# Allegro board galvo_ctrl_brd.brd
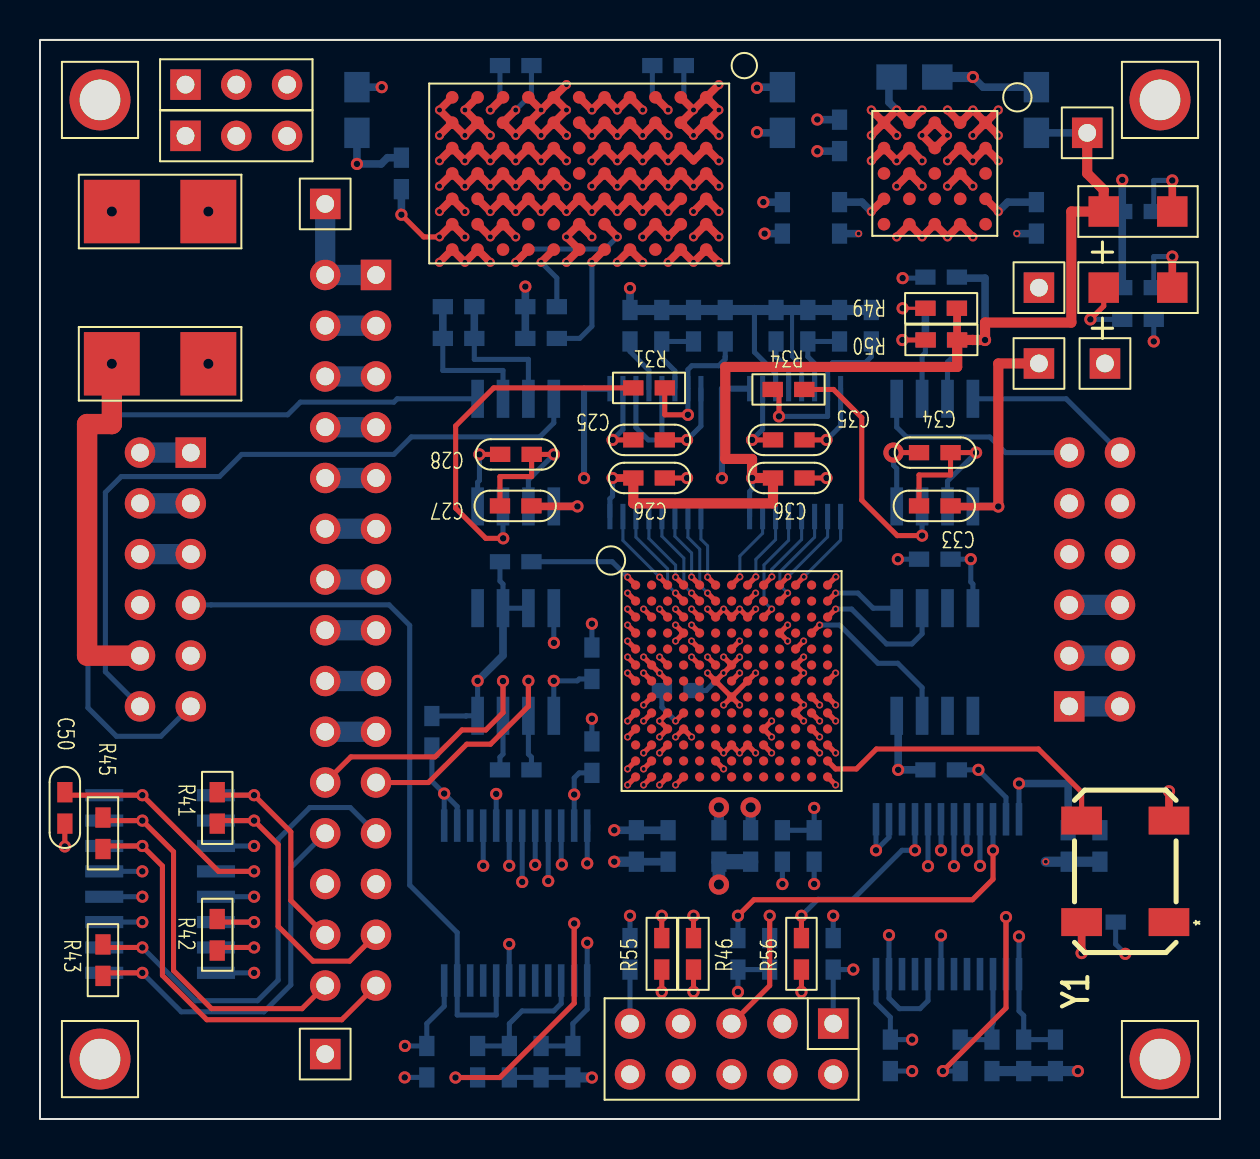
[diagram p0: board, top side]
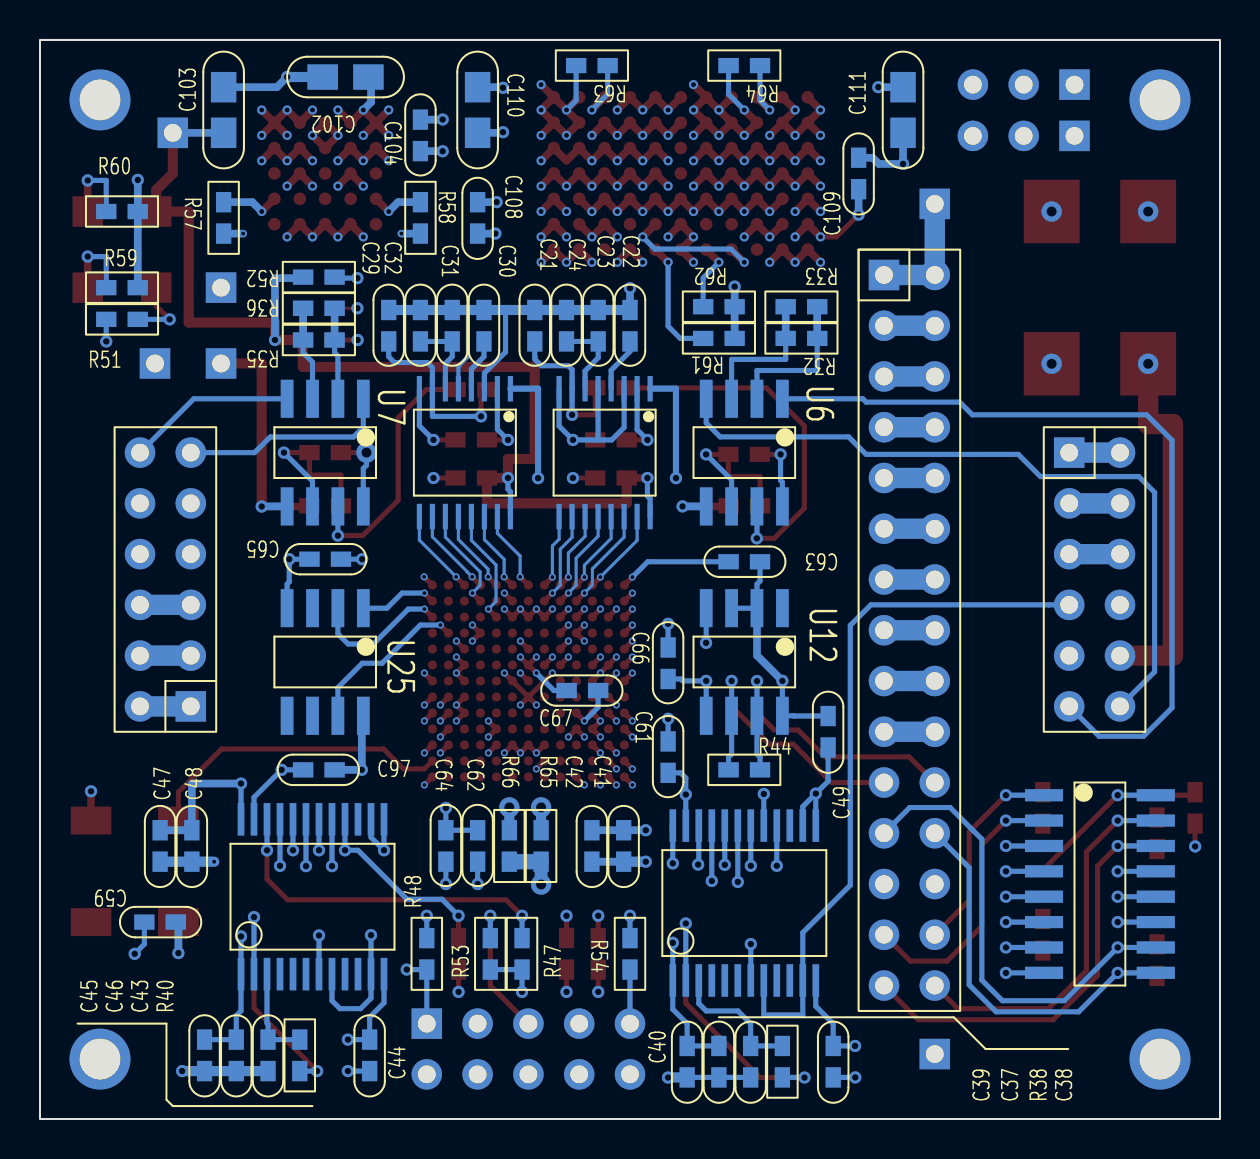
[diagram p1: board, bottom side, seen from below]

Outline 59 x 54 mm; copper layers: TOP, L2, L3, L4, L5, BOTTOM. Coordinates in mm from the lower left corner of the outline.
Outline path: rectangle 0,0 59,54

## Placement (name value [footprint] x y rotation side)
C21  220pF  [0603C]  34.26 39.7 270 bottom
C22  4.7uF  [0603C]  29.5 39.7 270 bottom
C23  10uF  [0603C]  31.09 39.7 270 bottom
C24  1uF  [0603C]  32.68 39.7 270 bottom
C25  0.1uF  [0603C]  30.45 33.98 180 top
C26  0.1uF  [0603C]  30.45 32.08 180 top
C27  0.1uF  [0603C]  23.79 30.68 0 top
C28  0.1uF  [0603C]  23.79 33.26 180 top
C29  220pF  [0603C]  41.57 39.7 270 bottom
C30  4.7uF  [0603C]  36.8 39.7 270 bottom
C31  10uF  [0603C]  38.39 39.7 270 bottom
C32  1uF  [0603C]  39.98 39.7 270 bottom
C33  0.1uF  [0603C]  44.74 30.68 0 top
C34  0.1uF  [0603C]  44.74 33.35 180 top
C35  0.1uF  [0603C]  37.44 33.98 180 top
C36  0.1uF  [0603C]  37.44 32.08 180 top
C37  1uF  [0603C]  23.47 2.87 90 bottom
C38  0.1uF  [0603C]  19.34 2.87 90 bottom
C39  0.1uF  [0603C]  25.06 2.87 90 bottom
C40  10uF  [0603C]  26.64 2.87 90 bottom
C41  0.1uF  [0603C]  29.82 13.66 90 bottom
C42  10uF  [0603C]  31.41 13.66 90 bottom
C43  1uF  [0603C]  47.6 3.19 90 bottom
C44  0.1uF  [0603C]  42.52 3.19 90 bottom
C45  0.1uF  [0603C]  50.77 3.19 90 bottom
C46  10uF  [0603C]  49.19 3.19 90 bottom
C47  0.1uF  [0603C]  53 13.66 90 bottom
C48  10uF  [0603C]  51.41 13.66 90 bottom
C49  0.1uF  [0603C]  19.59 19.38 90 bottom
C50  0.1uF  [0603C]  1.24 15.57 270 top
C59  0.1uF  [0603C]  53 9.85 0 bottom
C61  0.1uF  [0603C]  27.6 18.11 270 bottom
C62  0.1uF  [0603C]  37.12 13.66 270 bottom
C63  0.1uF  [0603C]  23.79 27.89 0 bottom
C64  0.1uF  [0603C]  38.71 13.66 270 bottom
C65  0.1uF  [0603C]  44.74 28.02 0 bottom
C66  0.1uF  [0603C]  27.6 22.81 270 bottom
C67  0.1uF  [0603C]  31.88 21.44 180 bottom
C97  0.1uF  [0603C]  45.06 17.47 180 bottom
C102  47uF  [0805C]  43.72 52.15 0 bottom
C103  47uF  [0805C]  49.82 50.49 90 bottom
C104  4.7uF  [0603C]  39.98 49.22 270 bottom
C108  4.7uF  [0603C]  37.12 45.1 90 bottom
C109  4.7uF  [0603C]  18.07 47.32 90 bottom
C110  22uF  [0805C]  37.12 50.49 270 bottom
C111  47uF  [0805C]  15.85 50.49 90 bottom
D1  LED  [1206_LED]  54.9 41.6 0 top
D2  LED  [1206_LED]  54.9 45.41 0 top
J1  X_DRV_IF  [IDC12]  6.27 25.73 180 bottom
J2  Y_DRV_IF  [IDC12]  52.73 28.27 0 bottom
J3  HEADER 15X2  [IDC30]  15.53 18.11 180 bottom
J5  UART1  [SIP3]  9.82 49.2 90 top
J6  UART2  [SIP3]  9.82 51.76 90 top
J7  CON10  [IDC10]  34.58 3.5 270 top
L2  FB  [2412L]  6.01 45.41 180 top
L3  FB  [2412L]  6.01 37.79 180 top
P1  10M02SC U169  [UBGA169]  34.58 21.92 0 top
R31  100  [0603R]  30.45 36.59 0 top
R32  220  [0603R]  20.93 39.06 0 bottom
R33  NC  [0603R]  20.93 40.65 0 bottom
R34  100  [0603R]  37.42 36.51 180 top
R35  220  [0603R]  45.06 38.99 0 bottom
R36  NC  [0603R]  45.06 40.57 0 bottom
R38  100K  [0603R]  21.88 2.87 90 bottom
R40  100K  [0603R]  46.01 3.19 90 bottom
R41  100  [0603R]  8.86 15.57 90 top
R42  100  [0603R]  8.86 9.22 270 top
R43  100  [0603R]  3.15 7.95 270 top
R44  120  [0603R]  23.79 17.47 180 bottom
R45  100  [0603R]  3.15 14.3 90 top
R46  10K  [0603R]  32.68 8.27 90 top
R47  10K  [0603R]  34.9 8.27 90 bottom
R48  1K  [0603R]  39.66 8.27 90 bottom
R49  10K  [0603R]  45.06 40.57 180 top
R50  10K  [0603R]  45.07 38.99 180 top
R51  10K  [0603R]  54.9 40.02 180 bottom
R52  10K  [0603R]  45.06 42.13 180 bottom
R53  10K  [0603R]  36.49 8.27 90 bottom
R54  10K  [0603R]  29.5 8.27 270 bottom
R55  10K  [0603R]  31.09 8.27 90 top
R56  10K  [0603R]  38.07 8.27 90 top
R57  13.3K  [0603R]  49.82 45.1 270 bottom
R58  8.25K  [0603R]  39.98 45.1 270 bottom
R59  1K  [0603R]  54.9 41.6 180 bottom
R60  1K  [0603R]  54.9 45.41 180 bottom
R61  80.6K  [0603R]  25.06 39.06 0 bottom
R62  80.6K  [0603R]  25.06 40.65 0 bottom
R63  130K  [0603R]  31.41 52.72 0 bottom
R64  143K  [0603R]  23.79 52.72 0 bottom
R65  0  [0603R]  33.95 13.66 270 bottom
R66  0  [0603R]  35.53 13.66 270 bottom
T1  HOLE  [MOUNT-HOLE-79]  3 51 0 top
T2  HOLE  [MOUNT-HOLE-79]  56 51 0 top
T3  HOLE  [MOUNT-HOLE-79]  3 3 0 top
T4  HOLE  [MOUNT-HOLE-79]  56 3 0 top
TP2  P  [TP]  14.26 3.25 0 top
TP3  VAA12VP  [TP]  53.25 37.81 0 top
TP4  VCC12VN  [TP]  49.95 37.81 0 top
TP5  VDD3V3  [TP]  52.36 49.35 0 top
TP6  N  [TP]  14.26 45.8 0 top
TP7  VAA5V  [TP]  49.95 41.6 0 top
U5  ADS8685IPW  [TSSOP16]  30.77 33.35 270 bottom
U6  AD8421ARZ  [SO8]  23.79 33.35 270 bottom
U7  AD8421ARZ  [SO8]  44.74 33.35 270 bottom
U8  ADS8685IPW  [TSSOP16]  37.76 33.35 270 bottom
U9  DAC7731E  [SSOP24]  23.79 10.81 90 bottom
U10  DAC7731E  [SSOP24]  45.38 11.12 90 bottom
U11  AM26LV32E  [SO16]  6.01 11.76 180 bottom
U12  MAX3485ESA  [SO8]  23.79 22.87 270 bottom
U25  LM74CIM-3  [SO8]  44.74 22.87 270 bottom
U27  LTM8049  [BGA77]  26.96 47.32 270 top
U28  LTM4622Y  [BGA25]  44.74 47.32 270 top
Y1  OSC4_20M  [XTAL]  54.27 12.39 90 top

## Library data of the parts
C21-C49 C97 = CAP NP
C50 C59 C61-C67 C102-C104 C108-C111 = C
D1 D2 = LED_0
J1 J2 = HEADER 6X2
J3 = HEADER 15X2
J5 J6 = CON3
J7 = CON10
L2 L3 = INDUCTOR
P1 = 10M02SC U169_15
R31-R36 R38 R40-R66 = R
T1-T4 TP2-TP7 = CON1
U5 U8 = ADS8685IPW
U6 U7 = AD8421
U9 U10 = DAC7731E
U11 = AM26C32
U12 = MAX3485ESA
U25 = LM74CIM-3
U27 = LTM8049
U28 = LTM4622
Y1 = OSC4/SM_0

## Footprints (pads in the part's own frame, mm; a bottom-side part is the same pattern mirrored in y, then rotated)
0603C
  rect 1.016x0.762 smd: 1(-0.787,0) 2(0.787,0)
0603R
  rect 1.016x0.762 smd: 1(-0.787,0) 2(0.787,0)
0805C
  rect 1.524x1.27 smd: 1(-1.143,0) 2(1.143,0)
1206_LED
  rect 1.524x1.524 smd: 1(-1.714,0) 2(1.714,0)
2412L
  rect 2.794x3.175 smd: 1(-2.413,0) 2(2.413,0)
BGA25
  round 0.63 smd: A1(-2.54,2.54) A2(-1.27,2.54) A3(0,2.54) A4(1.27,2.54) A5(2.54,2.54) B1(-2.54,1.27) B2(-1.27,1.27) B3(0,1.27) B4(1.27,1.27) B5(2.54,1.27) C1(-2.54,0) C2(-1.27,0) C3(0,0) C4(1.27,0) C5(2.54,0) D1(-2.54,-1.27) D2(-1.27,-1.27) D3(0,-1.27) D4(1.27,-1.27) D5(2.54,-1.27) E1(-2.54,-2.54) E2(-1.27,-2.54) E3(0,-2.54) E4(1.27,-2.54) E5(2.54,-2.54)
BGA77
  round 0.63 smd: A1(-3.81,6.35) A2(-2.54,6.35) A3(-1.27,6.35) A4(0,6.35) A5(1.27,6.35) A6(2.54,6.35) A7(3.81,6.35) B1(-3.81,5.08) B2(-2.54,5.08) B3(-1.27,5.08) B4(0,5.08) B5(1.27,5.08) B6(2.54,5.08) B7(3.81,5.08) C1(-3.81,3.81) C2(-2.54,3.81) C3(-1.27,3.81) C4(0,3.81) C5(1.27,3.81) C6(2.54,3.81) C7(3.81,3.81) D1(-3.81,2.54) D2(-2.54,2.54) D3(-1.27,2.54) D4(0,2.54) D5(1.27,2.54) D6(2.54,2.54) D7(3.81,2.54) E1(-3.81,1.27) E2(-2.54,1.27) E3(-1.27,1.27) E4(0,1.27) E5(1.27,1.27) E6(2.54,1.27) E7(3.81,1.27) F1(-3.81,0) F2(-2.54,0) F3(-1.27,0) F4(0,0) F5(1.27,0) F6(2.54,0) F7(3.81,0) G1(-3.81,-1.27) G2(-2.54,-1.27) G3(-1.27,-1.27) G4(0,-1.27) G5(1.27,-1.27) G6(2.54,-1.27) G7(3.81,-1.27) H1(-3.81,-2.54) H2(-2.54,-2.54) H3(-1.27,-2.54) H4(0,-2.54) H5(1.27,-2.54) H6(2.54,-2.54) H7(3.81,-2.54) J1(-3.81,-3.81) J2(-2.54,-3.81) J3(-1.27,-3.81) J4(0,-3.81) J5(1.27,-3.81) J6(2.54,-3.81) J7(3.81,-3.81) K1(-3.81,-5.08) K2(-2.54,-5.08) K3(-1.27,-5.08) K4(0,-5.08) K5(1.27,-5.08) K6(2.54,-5.08) K7(3.81,-5.08) L1(-3.81,-6.35) L2(-2.54,-6.35) L3(-1.27,-6.35) L4(0,-6.35) L5(1.27,-6.35) L6(2.54,-6.35) L7(3.81,-6.35)
IDC10
  rect 1.524x1.524 hole 0.889: 1(-1.27,5.08)
  round 1.524 hole 0.889: 2(1.27,5.08) 3(-1.27,2.54) 4(1.27,2.54) 5(-1.27,0) 6(1.27,0) 7(-1.27,-2.54) 8(1.27,-2.54) 9(-1.27,-5.08) 10(1.27,-5.08)
IDC12
  rect 1.524x1.524 hole 0.889: 1(-1.27,7.62)
  round 1.524 hole 0.889: 2(1.27,7.62) 3(-1.27,5.08) 4(1.27,5.08) 5(-1.27,2.54) 6(1.27,2.54) 7(-1.27,0) 8(1.27,0) 9(-1.27,-2.54) 10(1.27,-2.54) 11(-1.27,-5.08) 12(1.27,-5.08)
IDC30
  rect 1.524x1.524 hole 0.889: 1(-1.27,24.13)
  round 1.524 hole 0.889: 2(1.27,24.13) 3(-1.27,21.59) 4(1.27,21.59) 5(-1.27,19.05) 6(1.27,19.05) 7(-1.27,16.51) 8(1.27,16.51) 9(-1.27,13.97) 10(1.27,13.97) 11(-1.27,11.43) 12(1.27,11.43) 13(-1.27,8.89) 14(1.27,8.89) 15(-1.27,6.35) 16(1.27,6.35) 17(-1.27,3.81) 18(1.27,3.81) 19(-1.27,1.27) 20(1.27,1.27) 21(-1.27,-1.27) 22(1.27,-1.27) 23(-1.27,-3.81) 24(1.27,-3.81) 25(-1.27,-6.35) 26(1.27,-6.35) 27(-1.27,-8.89) 28(1.27,-8.89) 29(-1.27,-11.43) 30(1.27,-11.43)
MOUNT-HOLE-79
  round 3.048 hole 2.032: 1(0,0)
SIP3
  rect 1.524x1.524 hole 0.889: 1(0,2.54)
  round 1.524 hole 0.889: 2(0,0) 3(0,-2.54)
SO8
  rect 1.905x0.635 smd: 1(-2.692,1.905) 2(-2.692,0.635) 3(-2.692,-0.635) 4(-2.692,-1.905) 5(2.692,-1.905) 6(2.692,-0.635) 7(2.692,0.635) 8(2.692,1.905)
SO16
  rect 1.905x0.61 smd: 1(-2.794,4.445) 2(-2.794,3.175) 3(-2.794,1.905) 4(-2.794,0.635) 5(-2.794,-0.635) 6(-2.794,-1.905) 7(-2.794,-3.175) 8(-2.794,-4.445) 9(2.794,-4.445) 10(2.794,-3.175) 11(2.794,-1.905) 12(2.794,-0.635) 13(2.794,0.635) 14(2.794,1.905) 15(2.794,3.175) 16(2.794,4.445)
SSOP24
  rect 1.626x0.33 smd: 1(-3.875,3.575) 2(-3.875,2.925) 3(-3.875,2.275) 4(-3.875,1.625) 5(-3.875,0.975) 6(-3.875,0.325) 7(-3.875,-0.325) 8(-3.875,-0.975) 9(-3.875,-1.625) 10(-3.875,-2.275) 11(-3.875,-2.925) 12(-3.875,-3.575) 13(3.875,-3.575) 14(3.875,-2.925) 15(3.875,-2.275) 16(3.875,-1.625) 17(3.875,-0.975) 18(3.875,-0.325) 19(3.875,0.325) 20(3.875,0.975) 21(3.875,1.625) 22(3.875,2.275) 23(3.875,2.925) 24(3.875,3.575)
TP
  rect 1.524x1.524 hole 0.889: 1(0,0)
TSSOP16
  rect 1.27x0.254 smd: 1(-3.2,2.275) 2(-3.2,1.625) 3(-3.2,0.975) 4(-3.2,0.325) 5(-3.2,-0.325) 6(-3.2,-0.975) 7(-3.2,-1.625) 8(-3.2,-2.275) 9(3.2,-2.275) 10(3.2,-1.625) 11(3.2,-0.975) 12(3.2,-0.325) 13(3.2,0.325) 14(3.2,0.975) 15(3.2,1.625) 16(3.2,2.275)
UBGA169
  round 0.457 smd: A1(-4.8,4.8) A2(-4,4.8) A3(-3.2,4.8) A4(-2.4,4.8) A5(-1.6,4.8) A6(-0.8,4.8) A7(0,4.8) A8(0.8,4.8) A9(1.6,4.8) A10(2.4,4.8) A11(3.2,4.8) A12(4,4.8) A13(4.8,4.8) B1(-4.8,4) B2(-4,4) B3(-3.2,4) B4(-2.4,4) B5(-1.6,4) B6(-0.8,4) B7(0,4) B8(0.8,4) B9(1.6,4) B10(2.4,4) B11(3.2,4) B12(4,4) B13(4.8,4) C1(-4.8,3.2) C2(-4,3.2) C3(-3.2,3.2) C4(-2.4,3.2) C5(-1.6,3.2) C6(-0.8,3.2) C7(0,3.2) C8(0.8,3.2) C9(1.6,3.2) C10(2.4,3.2) C11(3.2,3.2) C12(4,3.2) C13(4.8,3.2) D1(-4.8,2.4) D2(-4,2.4) D3(-3.2,2.4) D4(-2.4,2.4) D5(-1.6,2.4) D6(-0.8,2.4) D7(0,2.4) D8(0.8,2.4) D9(1.6,2.4) D10(2.4,2.4) D11(3.2,2.4) D12(4,2.4) D13(4.8,2.4) E1(-4.8,1.6) E2(-4,1.6) E3(-3.2,1.6) E4(-2.4,1.6) E5(-1.6,1.6) E6(-0.8,1.6) E7(0,1.6) E8(0.8,1.6) E9(1.6,1.6) E10(2.4,1.6) E11(3.2,1.6) E12(4,1.6) E13(4.8,1.6) F1(-4.8,0.8) F2(-4,0.8) F3(-3.2,0.8) F4(-2.4,0.8) F5(-1.6,0.8) F6(-0.8,0.8) F7(0,0.8) F8(0.8,0.8) F9(1.6,0.8) F10(2.4,0.8) F11(3.2,0.8) F12(4,0.8) F13(4.8,0.8) G1(-4.8,0) G2(-4,0) G3(-3.2,0) G4(-2.4,0) G5(-1.6,0) G6(-0.8,0) G7(0,0) G8(0.8,0) G9(1.6,0) G10(2.4,0) G11(3.2,0) G12(4,0) G13(4.8,0) H1(-4.8,-0.8) H2(-4,-0.8) H3(-3.2,-0.8) H4(-2.4,-0.8) H5(-1.6,-0.8) H6(-0.8,-0.8) H7(0,-0.8) H8(0.8,-0.8) H9(1.6,-0.8) H10(2.4,-0.8) H11(3.2,-0.8) H12(4,-0.8) H13(4.8,-0.8) J1(-4.8,-1.6) J2(-4,-1.6) J3(-3.2,-1.6) J4(-2.4,-1.6) J5(-1.6,-1.6) J6(-0.8,-1.6) J7(0,-1.6) J8(0.8,-1.6) J9(1.6,-1.6) J10(2.4,-1.6) J11(3.2,-1.6) J12(4,-1.6) J13(4.8,-1.6) K1(-4.8,-2.4) K2(-4,-2.4) K3(-3.2,-2.4) K4(-2.4,-2.4) K5(-1.6,-2.4) K6(-0.8,-2.4) K7(0,-2.4) K8(0.8,-2.4) K9(1.6,-2.4) K10(2.4,-2.4) K11(3.2,-2.4) K12(4,-2.4) K13(4.8,-2.4) L1(-4.8,-3.2) L2(-4,-3.2) L3(-3.2,-3.2) L4(-2.4,-3.2) L5(-1.6,-3.2) L6(-0.8,-3.2) L7(0,-3.2) L8(0.8,-3.2) L9(1.6,-3.2) L10(2.4,-3.2) L11(3.2,-3.2) L12(4,-3.2) L13(4.8,-3.2) M1(-4.8,-4) M2(-4,-4) M3(-3.2,-4) M4(-2.4,-4) M5(-1.6,-4) M6(-0.8,-4) M7(0,-4) M8(0.8,-4) M9(1.6,-4) M10(2.4,-4) M11(3.2,-4) M12(4,-4) M13(4.8,-4) N1(-4.8,-4.8) N2(-4,-4.8) N3(-3.2,-4.8) N4(-2.4,-4.8) N5(-1.6,-4.8) N6(-0.8,-4.8) N7(0,-4.8) N8(0.8,-4.8) N9(1.6,-4.8) N10(2.4,-4.8) N11(3.2,-4.8) N12(4,-4.8) N13(4.8,-4.8)
XTAL
  rect 1.397x2.032 smd: 1(-2.54,-2.184) 2(2.54,-2.184) 3(2.54,2.184) 4(-2.54,2.184)

## Nets
AGND: C21.1 C22.1 C23.1 C24.1 C25.1 C27.1 C28.1 C29.1 C30.1 C31.1 C32.1 C33.1 C34.1 C35.1 C37.1 C39.1 C40.1 C41.1 C42.1 C43.1 C45.1 C46.1 C47.1 C48.1 J1.10 J2.10 L3.2 U5.3(AGND) U5.5(REFGND) U5.8(AIN_GND) U6.6(REF) U7.6(REF) U8.3(AGND) U8.5(REFGND) U8.8(AIN_GND) U9.7(AGND) U10.7(AGND)
DGND: C26.1 C36.1 C38.1 C44.1 C49.1 C50.2 C59.2 C61.2 C62.2 C63.2 C64.2 C65.2 C66.2 C67.2 C97.1 J6.3 J7.2 J7.10 L2.2 P1.A1(GND_A1) P1.A13(GND_A13) P1.B8(GND_B8) P1.C3(GND_C3) P1.D5(GND_D5) P1.E11(GND_E11) P1.F3(GND_F3) P1.G7(GND_G7) P1.H12(GND_H12) P1.J4(GND_J4) P1.L9(GND_L9) P1.M6(GND_M6) P1.N1(GND_N1) P1.N13(GND_N13) R48.2 R55.1 R56.1 R59.2 R60.2 U5.1(DGND) U8.1(DGND) U9.13(DGND) U9.14(TEST) U9.23(R\E\F\E\N\) U10.13(DGND) U10.14(TEST) U10.23(R\E\F\E\N\) U11.8(GND) U11.12(G\) U12.5(GND) U25.4(GND) Y1.2(GND)
GND: C102.2 C103.2 C104.2 C108.2 C109.2 C110.2 C111.1 J1.3 J1.4 J2.3 J2.4 J3.7 J3.8 J3.9 J3.10 J3.11 J3.12 J3.13 J3.14 L2.1 L3.1 R57.2 R58.2 R61.1 R62.1 U27.A3(GND1) U27.A4(GND2) U27.B3(GND3) U27.B4(GND4) U27.B5(GND5) U27.B6(GND6) U27.C2(VOUT1N1) U27.C3(GND7) U27.C4(GND8) U27.C5(GND9) U27.C6(GND10) U27.D1(VOUT1N2) U27.D2(VOUT1N3) U27.D3(GND11) U27.D4(GND12) U27.D5(GND13) U27.D7(SYNC1) U27.E1(VOUT1N4) U27.E2(VOUT1N5) U27.E3(GND14) U27.E4(GND15) U27.E5(GND16) U27.F1(GND17) U27.F2(GND18) U27.F5(GND19) U27.F6(GND20) U27.F7(GND21) U27.G3(GND22) U27.G4(GND23) U27.G5(GND24) U27.H3(GND25) U27.H4(GND26) U27.H5(GND27) U27.J3(GND28) U27.J4(GND29) U27.J5(GND30) U27.J6(GND31) U27.K1(VOUT2P1) U27.K2(VOUT2P2) U27.K3(GND32) U27.K4(GND33) U27.K5(GND34) U27.K6(GND35) U27.L1(VOUT2P3) U27.L2(VOUT2P4) U27.L3(GND36) U27.L4(GND37) U28.B5(GND1) U28.C1(GND2) U28.C2(GND3) U28.C5(SYNC) U28.D5(GND4)
VCCA: P1.D4(VCCA3_D4) P1.D10(VCCA2_D10) P1.K4(VCCA1_K4) P1.K9(VCCA4_K9) R65.1
VCCO: C67.1 P1.F7(VCC_ONE_F7) P1.G6(VCC_ONE_G6) P1.G8(VCC_ONE_G8) P1.H7(VCC_ONE_H7) R66.1
VDD3V3: C26.2 C36.2 C38.2 C44.2 C49.2 C50.1 C59.1 C61.1 C62.1 C63.1 C64.1 C65.1 C66.1 C97.2 C103.1 D2.1(ANODE) J7.4 P1.C6(VCCIO8_C6) P1.C7(VCCIO8_C7) P1.C8(VCCIO8_C8) P1.F2(VCCIO1_F2) P1.F11(VCCIO6_F11) P1.G3(VCCIO1_G3) P1.G11(VCCIO6_G11) P1.H11(VCCIO5_H11) P1.J3(VCCIO2_J3) P1.J11(VCCIO5_J11) P1.K3(VCCIO2_K3) P1.L6(VCCIO3_L6) P1.L7(VCCIO3_L7) P1.L8(VCCIO3_L8) R46.1 R47.1 R49.1 R50.1 R51.1 R52.1 R53.1 R54.1 R65.2 R66.2 TP5.1 U5.16(DVDD) U8.16(DVDD) U9.12(VDD) U10.12(VDD) U11.4(G) U11.16(VCC) U12.2(R\E\) U12.3(DE) U12.8(VCC) U25.8(VCC) U28.A1(VOUT21) U28.B1(VOUT22) Y1.4(VCC)
C_DONE: D1.1(ANODE) P1.C5(IO_8_C5/CONF_DONE/DIFFIO_RX_T11) R51.2
CLK_20M: P1.M13(IO_3_M13/DIFFIO_TX_RX_B10N) Y1.3(OUT)
FPGA_MISO: J5.1 P1.E1(IO_1A_E1/DIFFIO_RX_L4P)
FPGA_MOSI: J6.2 P1.C2(IO_1A_C2/DIFFIO_RX_L1P)
FPGA_SCLK: J5.2 P1.C1(IO_1A_C1/DIFFIO_RX_L2N)
FPGA_SIG1: J6.1 P1.D1(IO_1A_D1/DIFFIO_RX_L1N)
FPGA_SS: J5.3 P1.B1(IO_1A_B1/DIFFIO_RX_L2P)
JTAG_TCK: J7.1 P1.G2(IO_1B_G2/TCK/DIFFIO_RX_L7P) R48.1
JTAG_TDI: J7.9 P1.F5(IO_1B_F5/TDI/DIFFIO_RX_L8N) R54.2
JTAG_TDO: J7.3 P1.F6(IO_1B_F6/TDO/DIFFIO_RX_L8P)
JTAG_TMS: J7.5 P1.G1(IO_1B_G1/TMS/DIFFIO_RX_L7N) R53.2
JTAGEN: P1.E5(IO_1B_E5/JTAGEN) R52.2
NCONFIG: P1.E7(INPUT_ONLY_8_E7/NCONFIG) R49.2
NSTATUS: P1.C4(IO_8_C4/NSTATUS/DIFFIO_RX_T11P) R50.2
TEMP_CS: P1.D12(IO_6_D12/DIFFIO_RX_R23P) U25.7(C\S\)
TEMP_DATA: P1.B13(IO_6_B13/DIFFIO_RX_R20P) U25.1(SI/O)
TEMP_SCK: P1.C13(IO_6_C13) U25.2(SCK)
VAA5V: C25.2 C35.2 C102.1 TP7.1 U5.2(AVDD) U8.2(AVDD) U28.D1(VOUT11) U28.E1(VOUT12)
VAA12VN: C27.2 C33.2 C41.2 C42.2 C47.2 C48.2 C111.2 R64.2 TP4.1 U6.5(V-) U7.5(V-) U9.24(VSS) U10.24(VSS) U27.G1(VOUT2N1) U27.G2(VOUT2N2) U27.H1(VOUT2N3) U27.H2(VOUT2N4) U27.J2(VOUT2N5)
VAA12VP: C28.2 C34.2 C39.2 C40.2 C45.2 C46.2 C104.1 C110.1 J1.9 J2.9 R63.2 TP3.1 U6.8(V+) U7.8(V+) U9.1(VCC) U10.1(VCC) U27.A1(VOUT1P1) U27.A2(VOUT1P2) U27.B1(VOUT1P3) U27.B2(VOUT1P4) U28.A2(VIN21) U28.B2(RUN2) U28.B3(VIN22) U28.D2(RUN1) U28.D3(VIN11) U28.E2(VIN12)
VPP: C108.1 C109.1 J1.1 J1.2 J2.1 J2.2 J3.15 J3.16 J3.17 J3.18 J3.19 J3.20 TP2.1 U27.A5(VIN11) U27.A6(VIN12) U27.A7(VIN13) U27.B7(RUN1) U27.K7(RUN2) U27.L5(VIN21) U27.L6(VIN22) U27.L7(VIN23)
VPPN: J1.5 J1.6 J2.5 J2.6 J3.1 J3.2 J3.3 J3.4 J3.5 J3.6 TP6.1
X_POS: R31.1 U6.7(OUT)
X_POS1: J1.11 U6.1(IN-)
X_POS2: J1.12 U6.4(IN+)
XDAC_CS#: P1.N2(IO_2_N2/DPCLK0/DIFFIO_RX_L18N) U9.20(C\S\)
XDAC_LDAC: P1.L3(IO_2_L3/PLL_L_CLKOUTP/DIFFIO_RX) U9.17(LDAC)
XDAC_RST#: P1.L2(IO_2_L2) R55.2 U9.16(R\S\T\)
XDAC_RSTSEL: P1.N4(IO_3_N4/DIFFIO_RX_B4N) R46.2 U9.22(RSTSEL)
XDAC_SCK: P1.N3(IO_2_N3/DPCLK1/DIFFIO_RX_L18P) U9.21(SCLK)
XDAC_SDI: P1.M1(IO_2_M1/DIFFIO_RX_L17N) U9.18(SDI)
XDAC_SDO: P1.M2(IO_2_M2/DIFFIO_RX_L17P) U9.19(SDO)
XMOTOR_DRV: J1.7 U9.8(RFB2) U9.11(VOUT)
XPADC_CS: P1.A5(IO_8_A5) U5.11(CONVST/C\S\)
XPADC_RST: P1.A6(IO_8_A6/DIFFIO_RX_T6N) U5.9(R\S\T\)
XPADC_RVS: P1.A3(IO_8_A3/DIFFIO_RX_T8N) U5.15(RVS)
XPADC_SCK: P1.B5(IO_8_B5/DIFFIO_RX_T7N) U5.12(SCLK)
XPADC_SDI: P1.B6(IO_8_B6/DIFFIO_RX_T7P) U5.10(SDI)
XPADC_SDO0: P1.A4(IO_8_A4/DIFFIO_RX_T8P) U5.13(SDO-0)
XPADC_SDO1: P1.B4(IO_8_B4/DIFFIO_RX_T10N) U5.14(ALARM/SDO-1/GPO)
XY_CLK: P1.H2(IO_1B_H2/DIFFIO_RX_L12N) U11.13(4Y)
XY_CLK+: J3.29 R45.1 U11.14(4A)
XY_CLK-: J3.30 R45.2 U11.15(4B)
XY_STATUS: P1.F1(IO_1A_F1/DIFFIO_RX_L4N) U12.4(DI)
XY_STATUS+: J3.21 R44.1 U12.6(A)
XY_STATUS-: J3.22 R44.2 U12.7(B)
XY_SYNC: P1.J2(IO_2_J2/DIFFIO_RX_L15P) U11.3(1Y)
XY_SYNC+: J3.27 R41.1 U11.2(1A)
XY_SYNC-: J3.28 R41.2 U11.1(1B)
XY_X: P1.K1(IO_2_K1/DIFFIO_RX_L20N) U11.5(2Y)
XY_X+: J3.25 R42.1 U11.6(2A)
XY_X-: J3.26 R42.2 U11.7(2B)
XY_Y: P1.J1(IO_2_J1/DIFFIO_RX_L15N) U11.11(3Y)
XY_Y+: J3.23 R43.1 U11.10(3A)
XY_Y-: J3.24 R43.2 U11.9(3B)
Y_POS: R34.1 U7.7(OUT)
Y_POS1: J2.11 U7.1(IN-)
Y_POS2: J2.12 U7.4(IN+)
YDAC_CS#: P1.J12(IO_5_J12/DIFFIO_RX_R3N) U10.20(C\S\)
YDAC_LDAC: P1.L12(IO_5_L12/DIFFIO_RX_R2N) U10.17(LDAC)
YDAC_RST#: P1.L13(IO_5_L13) R56.2 U10.16(R\S\T\)
YDAC_RSTSEL: P1.G13(IO_5_G13/DIFFIO_RX_R7P) R47.2 U10.22(RSTSEL)
YDAC_SCK: P1.H13(IO_5_H13/DIFFIO_RX_R5N) U10.21(SCLK)
YDAC_SDI: P1.K12(IO_5_K12/DIFFIO_RX_R3P) U10.18(SDI)
YDAC_SDO: P1.J13(IO_5_J13/DIFFIO_RX_R5P) U10.19(SDO)
YMOTOR_DRV: J2.7 U10.8(RFB2) U10.11(VOUT)
YPADC_CS: P1.B10(IO_8_B10/DIFFIO_RX_T3P) U8.11(CONVST/C\S\)
YPADC_RST: P1.A11(IO_8_A11/DIFFIO_RX_T4N) U8.9(R\S\T\)
YPADC_RVS: P1.A7(IO_8_A7/DIFFIO_RX_T6P) U8.15(RVS)
YPADC_SCK: P1.A9(IO_8_A9/DIFFIO_RX_T2N) U8.12(SCLK)
YPADC_SDI: P1.A10(IO_8_A10/DIFFIO_RX_T4P) U8.10(SDI)
YPADC_SDO0: P1.C9(IO_8_C9/DIFFIO_RX_T1N) U8.13(SDO-0)
YPADC_SDO1: P1.A8(IO_8_A8/DIFFIO_RX_T2P) U8.14(ALARM/SDO-1/GPO)
N226020: R32.2 R33.2 U6.3(RG2)
N226052: R32.1 R33.1 U6.2(RG1)
N226084: R35.2 R36.2 U7.3(RG2)
N226092: R35.1 R36.1 U7.2(RG1)
N226292: C22.2 U5.4(REFIO)
N226324: C23.2 C24.2 U5.6(REFCAP)
N226514: C21.2 R31.2 U5.7(AIN_P)
N226706: C30.2 U8.4(REFIO)
N226730: C31.2 C32.2 U8.6(REFCAP)
N227168: C29.2 R34.2 U8.7(AIN_P)
N229341: C37.2 R38.2 U9.3(REFIN)
N229345: R38.1 U9.2(REFOUT)
N229701: C43.2 R40.2 U10.3(REFIN)
N229705: R40.1 U10.2(REFOUT)
N240581: R57.1 U28.A4(FB2)
N240585: R58.1 U28.E4(FB1)
N241423: U27.E6(CLKOUT1) U27.H7(SYNC2)
N298949: D1.2(CATHODE) R59.1
N299720: D2.2(CATHODE) R60.1
N2414151: R61.2 U27.E7(RT1)
N2414351: R62.2 U27.G7(RT2)
N24162114: R63.1 U27.C1(FBX1)
N24162156: R64.1 U27.J1(FBX2)

Pads without a net: J1 8; J2 8; J7 6 7 8; P1 A2 A12 B2 B3 B7 B9 B11 B12 C10 C11 C12 D2 D3 D6 D7 D8 D9 D11 D13 E2 E3 E4 E6 E8 E9 E10 E12 E13 F4 F8 F9 F10 F12 F13 G4 G5 G9 G10 G12 H1 H3 H4 H5 H6 H8 H9 H10 J5 J6 J7 J8 J9 J10 K2 K5 K6 K7 K8 K10 K11 K13 L1 L4 L5 L10 L11 M3 M4 M5 M7 M8 M9 M10 M11 M12 N5 N6 N7 N8 N9 N10 N11 N12; T1 1; T2 1; T3 1; T4 1; U9 4 5 6 9 10 15; U10 4 5 6 9 10 15; U12 1; U25 3 5 6; U27 C7 D6 F3 F4 G6 H6 J7; U28 A3 A5 B4 C3 C4 D4 E3 E5; Y1 1

## Via types
v1: diameter 0.356, hole 0.203, TOP to BOTTOM, 96 vias
v2: diameter 1.016, hole 0.508, TOP to BOTTOM, 8 vias
v3: diameter 0.457, hole 0.254, TOP to BOTTOM, 112 vias
v4: diameter 0.61, hole 0.33, TOP to BOTTOM, 122 vias

## Routing (per net, layer and track width the routed paths; a pad name or vN(x,y) marks a point on that pad's centre or on a via; arc(x,y) is an arc through that point)
AGND: length 276.8
  TOP w0.254: C33.1 43.95,32.23 45.53,32.23 C34.1 v4(46.8,33.35) ; C35.1 v4(39.33,33.98) ; C27.1 23,32.15 24.58,32.15 C28.1 v4(25.7,33.26) ; C25.1 v4(32.35,33.98)
  TOP w1.016: J1.10 2.35,23.19 2.35,34.78 3.59,34.78 v2(3.59,37.79)
  L2 w0.508: J2.10 54,29.54 46.8,29.54 v4(46.8,33.35) ; 50.29,7.63 46.6,7.63 v4(45.05,9.19) ; 50.29,7.63 50.29,4 v4(51.89,2.4) ; 50.29,7.63 v1(50.29,12.88) ; v4(25.7,33.26) 25.7,37.78 v4(29.5,41.58)
  L3 w0.508: v4(27.6,2.08) 23.47,2.08 22.36,0.96 9.5,0.96 2.99,7.47 2.99,21.18 J1.10 6.27,24.46 10.29,24.46 11.72,25.89 11.72,31.92 13.15,33.35 19.18,33.35 21.09,35.25 25.7,35.25 ; 32.35,33.03 v4(32.35,33.98) ; 32.35,33.03 39.33,33.03 v4(39.33,33.98) 39.33,35.25 44.58,35.25 44.58,33.35 v4(46.8,33.35) ; 32.35,33.03 31.08,33.03 31.08,35.25 25.7,35.25 ; 25.7,35.25 v4(25.7,33.26)
  L5 w0.508: v4(28.71,12.88) 28.71,10.81 23.46,10.81 v4(23.46,8.76) 23.46,7.47 ; 23.46,7.47 23.46,2.08 v4(27.6,2.08) ; 23.46,7.47 39.03,7.47 40.14,6.36 42.23,6.36 v4(45.05,9.19)
  BOTTOM w0.203: 37.6,40.49 37.6,38.15 38.08,37.67 U8.5
  BOTTOM w0.254: U10.7 v4(45.05,9.19) ; U8.3 36.78,37.32 35.72,38.38 35.72,40.49 ; C40.1 C39.1 C37.1 ; U5.5 31.1,33.98 ; 31.1,33.98 v4(32.35,33.98) 33.05,34.68 U5.8 ; 31.1,33.98 30.41,33.98 29.79,34.6 U5.3 ; v4(25.7,33.26) 24.42,31.98 U6.6 ; U8.8 40.03,34.69 v4(39.33,33.98) ; v4(46.8,33.35) 45.38,31.92 U7.6 ; v4(23.46,8.76) U9.7
  BOTTOM w0.381: C22.1 v4(29.5,41.58) ; C42.1 C41.1
  BOTTOM w0.508: C47.1 C48.1 v1(50.29,12.88) ; C22.1 C23.1 C24.1 C21.1 C30.1 C31.1 C32.1 C29.1 ; C40.1 27.59,2.08 v4(27.6,2.08) ; v4(51.89,2.4) C45.1 C46.1 C43.1 ; C41.1 v4(28.71,12.88)
DGND: length 262.7
  TOP w0.254: v1(39.79,27.13) 39.38,26.72 P1.A13 ; P1.B8 v1(35.78,26.32) ; v1(34.98,22.32) 34.58,21.92 P1.G7 ; P1.A1 v1(29.38,27.12) ; P1.E11 37.78,23.52 v1(38.18,23.92) ; P1.H12 v1(38.98,20.72) ; C36.1 v4(39.33,32.08) ; P1.D5 v1(32.58,24.72) ; P1.F3 v1(30.98,23.12) ; P1.N13 v1(39.78,16.72) ; R56.1 v4(38.07,6.36) ; P1.C3 v1(30.98,25.52) ; v1(29.38,16.72) 29.78,17.12 P1.N1 ; P1.L9 v1(36.58,18.32) ; C26.1 v4(32.35,32.08) ; P1.J4 v1(31.78,19.92) ; P1.M6 v1(34.18,17.52) ; R55.1 v4(31.09,6.36) ; C50.2 v4(1.24,13.64)
  TOP w0.381: 56.45,14.93 v4(56.45,16.4)
  L2 w0.508: v2(3.59,45.41) 5.53,45.41 5.53,53.19 12.36,53.19 J6.3 ; 10.61,4.93 10.7,5.03 v4(10.7,7.31) ; 16.64,4.93 16.64,3.68 v4(18.24,2.08) ; 2.99,13.66 2.96,13.64 v4(1.24,13.64) ; 2.99,11.28 3.15,11.12 v4(5.12,11.12) ; v4(39.33,32.08) 45.38,32.08 45.38,28.02 v4(46.54,28.02)
  L2 w1.016: J7.10 26.8,4.93 5.37,4.93 2.99,7.31 2.99,16.52 1.88,16.52 1.88,45.41 v2(3.59,45.41)
  L4 w0.381: v4(38.71,11.76) 38.71,11.12 41.8,11.12 v4(41.8,13.45) ; 46.96,16.36 46.92,16.36 46.92,15.57 48.87,15.57 48.87,11.12
  L4 w0.508: 41.88,2.23 J7.2 ; 41.88,2.23 41.88,6.36 40.77,6.36 ; 41.88,2.23 42.05,2.4 v4(43.61,2.4) ; 48.87,11.12 51.41,11.12 v4(54.27,8.27) ; 48.87,15.57 55.62,15.57 v4(56.45,16.4) 57.92,17.87 57.92,43.99 54.91,47 v4(54.11,47) ; 46.92,16.36 v4(46.92,17.47)
  L4 w1.016: 22.2,4.93 26.8,4.93 J7.10
  BOTTOM w0.254: C63.2 28.61,27.89 v1(29.38,27.12) ; C62.2 v4(37.12,11.76) ; U10.23 48.3,16.09 v4(46.92,17.47) C97.1 ; C64.2 v4(38.71,11.76) ; C65.2 v4(46.54,28.02) 46.54,26.88 46.65,26.77 U25.4 ; U9.13 v4(20.21,16.29) ; v4(20.21,16.29) 19.59,16.9 C49.1 ; v4(20.21,16.29) 20.86,15.64 U9.14 ; v4(54.27,8.27) 53.78,8.75 C59.2 ; U9.23 v4(26.71,16.24) 26.71,17.07 26.96,17.32 C61.2 ; 8.8,7.31 v4(10.7,7.31) ; R48.2 v4(39.66,10.17) ; U12.5 v4(25.69,21.93) 26.87,21.93 26.96,22.02 C66.2 ; U11.12 v4(5.12,11.12) ; U10.14 42.45,14.1 v4(41.8,13.45) U10.13 ; C44.1 v4(43.61,2.4) ; C38.1 v4(18.24,2.08) ; C67.2 31.09,20.61 v1(31.78,19.92)
  BOTTOM w0.305: U5.1 27.2,36.55 v4(27.2,32.07) ; v4(34.1,32.07) 34.1,36.55 U8.1
  BOTTOM w0.381: R59.2 R60.2 v4(54.11,47)
GND: length 156
  TOP w0.381: U27.L2 v3(19.98,49.22) ; U27.L2 v3(19.98,50.49) U27.L1 ; U27.L2 v3(21.25,49.22) U27.K2 ; U27.B5 v3(31.41,45.41) U27.C5 v3(30.14,45.41) U27.D5 v3(28.87,45.41) U27.E5 v3(27.6,45.41) U27.F5 v3(26.33,45.41) U27.G5 v3(25.06,45.41) U27.H5 v3(23.79,45.41) U27.J5 v3(22.52,45.41) U27.K5 ; v3(28.87,42.87) U27.D7 v3(30.14,42.87) ; v3(33.95,46.68) U27.A4 v3(32.68,46.68) U27.B4 v3(31.41,46.68) U27.C4 v3(30.14,46.68) U27.D4 v3(28.87,46.68) U27.E4 v3(27.6,46.68) ; v3(26.33,42.87) U27.F7 v3(26.33,44.14) U27.F6 v3(27.6,44.14) ; U27.F2 v3(27.6,49.22) U27.E2 v3(28.87,49.22) U27.D2 v3(30.14,49.22) U27.C2 v3(31.41,49.22) ; U27.K6 v3(22.52,44.14) U27.J6 v3(23.79,44.14) ; v3(30.14,50.49) U27.D1 v3(28.87,50.49) U27.E1 v3(27.6,50.49) U27.F1 ; v3(26.33,46.68) U27.G4 v3(25.06,46.68) U27.H4 v3(23.79,46.68) U27.J4 v3(22.52,46.68) U27.K4 v3(21.25,46.68) U27.L4 v3(19.98,46.68) ; v3(19.98,47.95) U27.L3 v3(21.25,47.95) U27.K3 v3(22.52,47.95) U27.J3 v3(23.79,47.95) U27.H3 v3(25.06,47.95) U27.G3 v3(26.33,47.95) ; U27.K2 v3(21.25,50.49) U27.K1 ; U27.K2 v3(22.52,49.22) ; v3(30.14,44.14) U27.C6 v3(31.41,44.14) U27.B6 ; v3(46.65,44.14) U28.B5 v3(45.38,44.14) U28.C5 v3(44.11,44.14) U28.D5 v3(42.84,44.14) ; v3(27.6,47.95) U27.E3 v3(28.87,47.95) U27.D3 v3(30.14,47.95) U27.C3 v3(31.41,47.95) U27.B3 32.68,47.95 U27.A3 v3(33.95,47.95) ; U28.C2 v3(45.38,49.22) U28.C1 v3(44.11,49.22) U28.C2
  L4 w1.016: 9.97,30.81 J1.3 J1.4 2.83,30.81 2.67,30.97 ; 18.71,27 J3.13 J3.14 12.2,27 12.2,27.16 ; 19.34,29.38 19.34,29.54 J3.11 J3.12 12.04,29.54 ; 19.18,31.92 19.18,32.08 J3.9 J3.10 11.88,32.08 ; 12.2,34.62 J3.8 J3.7 19.02,34.62
  BOTTOM w0.381: v4(38.87,48.43) 38.87,48.44 C104.2 ; v4(46.65,52.15) 47.15,51.64 C103.2 ; C108.2 v4(36.17,45.88) ; v4(24.27,41.66) R62.1 R61.1 ; C110.2 35.88,49.35 v4(35.85,49.38) ; R58.2 v1(40.93,44.31) ; R57.2 v1(48.84,44.31) ; C111.1 v4(15.85,47.8) 17.06,47.8 17.37,48.11 C109.2
  BOTTOM w0.508: v4(46.65,52.15) C102.2
  BOTTOM w1.016: J3.13 J3.14 ; J3.9 J3.10 ; J3.7 J3.8 ; J3.11 J3.12 ; J2.3 J2.4 ; J1.3 J1.4
  vias: v2(8.42,45.41) v2(8.42,37.79)
VCCA: length 9.4
  TOP w0.254: v1(32.58,19.12) P1.K4 32.18,19.52 v1(31.78,19.12) ; v1(36.58,19.12) P1.K9 36.18,19.52 v1(36.58,19.92) ; v1(31.78,24.72) P1.D4 v1(31.78,23.92) ; v1(37.38,23.92) P1.D10 36.98,24.32 v1(37.38,24.72)
  L5 w0.508: v2(33.95,15.6) 32.52,17.02 32.52,18.74
  BOTTOM w0.508: R65.1 v2(33.95,15.6)
VCCO: length 18.5
  TOP w0.254: P1.H7 34.58,21.12 v1(34.18,20.72) ; P1.H7 P1.G8 35.38,21.92 v1(35.78,22.32) ; P1.H7 v1(34.98,20.72) ; P1.H7 P1.G6 ; P1.G6 v1(33.38,22.32) ; P1.G6 v1(34.18,22.32) P1.F7 ; P1.F7 v1(34.18,23.12) ; P1.F7 34.58,22.72 v1(34.98,23.12)
  L3 w0.508: v2(35.53,15.6) 37.37,15.6 37.37,20.97 35.85,20.97
  BOTTOM w0.254: C67.1 33.3,21.44 v1(34.18,22.32)
  BOTTOM w0.508: R66.1 v2(35.53,15.6)
VDD3V3: length 262.6
  TOP w0.254: R46.1 v4(32.68,6.36) ; v1(35.78,25.52) P1.C8 v1(34.98,25.52) P1.C7 v1(34.18,25.52) P1.C6 v1(33.38,25.52) ; C50.1 1.39,16.2 v4(5.12,16.2) 8.93,12.39 v4(10.7,12.39) ; v1(30.18,23.12) P1.F2 v1(30.98,22.32) P1.G3 ; P1.J3 v1(30.98,19.92) P1.K3 v1(30.98,19.12) ; P1.L6 v1(34.18,18.32) 34.58,18.72 P1.L7 v1(34.98,18.32) 35.38,18.72 P1.L8 v1(35.78,18.32) ; P1.G11 37.78,21.92 v1(38.18,22.32) P1.F11 37.78,22.72 v1(38.18,23.12) ; P1.H11 v1(38.18,20.72) 37.78,20.32 P1.J11 v1(38.18,19.92)
  TOP w0.381: U28.A1 v3(47.92,50.49) ; U28.A1 v3(47.92,49.22) ; U28.A1 v3(46.65,49.22) ; U28.A1 v3(46.65,50.49) U28.B1 v3(45.38,50.49) ; R49.1 45.86,40.56 R50.1 ; Y1.4 v4(52.08,8.31) ; C26.2 v4(28.63,32.08)
  TOP w0.508: TP5.1 52.36,47.32 53.19,46.49 D2.1 51.57,45.41 51.57,39.86 47.25,39.86 v4(47.25,38.99) 46.63,38.99 46.63,38.99 R50.1 45.86,37.64 34.26,37.64 34.26,33.03 35.6,33.03 v4(35.6,32.08) C36.2 36.65,30.81 29.67,30.81 C26.2
  L2 w0.508: v4(28.63,32.08) 29.74,30.97 34.49,30.97 v4(35.6,32.08)
  L2 w1.016: 47.92,51.92 52.36,51.92 TP5.1
  L3 w0.508: 18.25,5.09 12.36,5.09 12.36,12.39 v4(10.7,12.39) ; 18.25,5.09 20.61,5.09 20.61,10.01 ; 18.25,5.09 v4(18.25,3.66) ; 39.66,6.52 43.61,6.52 v4(43.61,3.97) 52.08,3.97 v4(52.08,8.31)
  L3 w0.635: 35.98,2.23 J7.4 ; J7.4 37.12,1.09 ; J7.4 38.26,2.23 ; J7.4 37.12,3.38
  L4 w1.016: TP5.1 52.36,44.93 55.69,41.6 v4(55.69,38.91) 56.17,38.43 56.17,18.74 44.74,18.74 44.74,15.09 40.3,15.09 40.3,13.66 33.95,13.66 v2(33.95,11.73)
  BOTTOM w0.254: R51.1 v4(55.69,38.91) ; v4(28.63,32.08) 28.63,31.17 28.49,31.04 U5.16 ; v4(43.61,3.97) C44.2 42.52,5.09 41.8,5.81 U10.12 ; C49.2 21.3,20.17 21.31,20.18 U12.8 v4(21.88,21.93) ; C66.1 v4(27.6,24.78) ; C63.1 23,26.92 23.15,26.77 U12.2 U12.3 ; C61.1 v4(27.6,20.03) ; R52.1 45.84,42.08 ; U11.4 v4(10.7,12.39) ; U8.16 35.48,31.4 35.6,31.52 v4(35.6,32.08) ; C65.1 v4(42.89,28.02) ; C62.1 C64.1 v4(38.71,15.57) ; U11.16 v4(5.12,16.2) ; v4(18.25,3.66) C38.2 19.34,4.77 20.21,5.64 U9.12 ; v4(34.9,6.36) R47.1 R53.1 ; R54.1 v4(29.5,10.17)
  BOTTOM w0.381: U12.2 23.15,23.2 v4(21.88,21.93) ; C59.1 52.08,9.73 v4(52.08,8.31) ; U25.8 42.91,20.11 v4(42.91,17.47) C97.2 ; 45.84,42.08 47.25,42.08 v4(47.25,38.99) ; C103.1 TP5.1
  BOTTOM w0.635: R65.2 v2(33.95,11.73)
  BOTTOM w0.762: R66.2 R65.2
C_DONE: length 35.4
  TOP w0.254: v4(52.52,40.02) 53.19,40.68 D1.1 ; P1.C5 v1(32.58,25.52)
  L2 w0.152: v4(52.52,40.02) 45.69,40.02 44.36,41.35 41.63,41.35 38.14,37.86 38.14,34.3 36.96,33.13 36.96,30.97 34.02,28.03 34.02,26.31 33.64,25.93 32.99,25.93 v1(32.58,25.52)
  BOTTOM w0.254: R51.2 v4(52.52,40.02)
CLK_20M: length 15.6
  TOP w0.254: P1.M13 39.78,17.52 40.82,17.52 41.82,18.52 49.92,18.52 52.08,16.36 52.08,14.93
FPGA_MISO: length 41.9
  TOP w0.254: P1.E1 v1(29.38,23.92)
  L2 w0.152: v1(29.38,23.92) 27.35,23.92 25.84,25.43 20.89,25.43 18.91,27.41 18.91,29.69 17.82,30.78 13.09,30.78 9.82,34.06 9.82,45.57 7.28,48.11 J5.1
FPGA_MOSI: length 42.5
  TOP w0.254: P1.C2 v1(30.18,25.52)
  L2 w0.152: v1(30.18,25.52) 29.77,25.93 28.66,25.93 27.95,26.64 21.42,26.64 20.41,27.66 20.41,35.97 17.94,38.43 13.19,38.43 11.8,39.83 11.8,46.81 11.09,47.52 11.09,50.49 J6.2
FPGA_SCLK: length 39.6
  TOP w0.254: P1.C1 v1(29.38,25.52)
  L2 w0.152: J5.2 9.82,47.42 11.14,46.1 11.14,37.77 13.04,35.86 17.94,35.86 19.95,33.86 19.95,27.56 21.27,26.24 27.7,26.24 28.41,25.52 v1(29.38,25.52)
FPGA_SIG1: length 43.8
  TOP w0.254: P1.D1 v1(29.38,24.72)
  L2 w0.152: J6.1 8.62,50.42 8.62,47.73 10.5,45.85 10.5,36.09 13.32,33.27 18.12,33.27 19.42,31.98 19.42,27.51 21.07,25.86 27.44,25.86 28.58,24.72 v1(29.38,24.72)
FPGA_SS: length 37.2
  TOP w0.254: P1.B1 v1(29.38,26.32)
  L2 w0.152: J5.3 12.36,41.94 13.37,40.92 17.77,40.92 20.89,37.79 20.89,27.76 21.6,27.05 28.65,27.05 v1(29.38,26.32)
JTAG_TCK: length 25.3
  TOP w0.254: P1.G2 v1(30.18,22.32)
  L2 w0.152: v1(30.18,22.32) 30.81,21.69 31.76,21.69 33.45,20 33.45,16.67 32.83,16.05 32.83,15.09 37.32,10.6 37.32,9.45 39.29,7.48 v4(40.66,7.48)
  BOTTOM w0.254: v4(40.66,7.48) R48.1 J7.1
JTAG_TDI: length 40
  TOP w0.254: P1.F5 v1(32.58,23.12)
  L2 w0.152: J7.9 29.5,6.68 30.41,7.59 38.49,7.59 39.43,6.65 41.11,6.65 41.54,7.09 41.54,7.92 40.9,8.56 40.9,10.36 39.71,11.56 39.71,12.83 37.76,14.78 37.76,16.87 37.12,17.5 37.12,20.24 36.05,21.31 32.93,21.31 32.27,21.97 32.27,22.81 v1(32.58,23.12)
  BOTTOM w0.254: R54.2 J7.9
JTAG_TDO: length 30.1
  TOP w0.254: P1.F6 v1(33.38,23.12)
  L2 w0.152: v1(33.38,23.12) 32.93,22.67 32.93,22 33.23,21.69 36.28,21.69 37.5,20.47 37.5,17.65 38.11,17.04 38.11,14.91 40.07,12.95 40.07,11.71 41.31,10.46 41.31,8.76 41.97,8.1 41.97,6.98 41.21,6.22 39.23,6.22 38.26,7.19 37.6,7.19 37.12,6.71 J7.3
JTAG_TMS: length 24.3
  TOP w0.254: P1.G1 v1(29.38,22.32) ; J7.5 36.49,6.68 v4(36.49,10.17)
  L2 w0.152: v4(36.49,10.17) 36.49,10.81 32.36,14.93 32.36,16.2 33.08,16.93 33.08,19.84 31.56,21.36 30.34,21.36 v1(29.38,22.32)
  BOTTOM w0.254: R53.2 v4(36.49,10.17)
JTAGEN: length 30.2
  TOP w0.254: P1.E5 v1(32.58,23.92)
  L2 w0.152: v4(43.13,42.08) 41.57,42.08 37.68,38.19 37.68,34.62 36.49,33.43 36.49,31.29 34.1,28.9 31.41,28.9 30.08,27.58 30.08,26.82 30.59,26.31 30.59,24.31 31.48,23.42 32.08,23.42 v1(32.58,23.92)
  BOTTOM w0.254: R52.2 44.27,42.08 v4(43.13,42.08)
NCONFIG: length 24.8
  TOP w0.152: R49.2 v4(43.13,40.57)
  TOP w0.254: P1.E7 v1(34.98,23.92)
  L2 w0.152: v4(43.13,40.57) 44.11,39.6 44.11,37 40.14,33.03 38.71,33.03 38.07,32.4 38.07,30.17 39.15,29.1 39.15,27.25 35.82,23.92 v1(34.98,23.92)
NSTATUS: length 23.8
  TOP w0.254: R50.2 44.28,38.99 v4(43.12,38.99) ; P1.C4 v1(31.78,25.52)
  L2 w0.152: v1(31.78,25.52) P1.C4 34.38,25.12 34.58,25.32 34.58,27.79 37.52,30.73 37.52,32.91 38.59,33.98 38.59,37.52 40.06,38.99 v4(43.12,38.99)
TEMP_CS: length 8.4
  TOP w0.254: P1.D12 38.58,24.32 v1(38.98,24.72)
  BOTTOM w0.254: v1(38.98,24.72) 39.98,24.72 41.9,22.81 42.89,22.81 44.11,21.59 U25.7
TEMP_DATA: length 3.9
  TOP w0.254: v1(39.78,26.32) 39.38,25.92 P1.B13
  BOTTOM w0.254: v1(39.78,26.32) 40.9,26.32 41.65,25.56 U25.1
TEMP_SCK: length 7.1
  TOP w0.254: v1(39.78,25.52) 39.38,25.12 P1.C13
  BOTTOM w0.254: U25.2 44.11,24.28 43.6,23.77 42.33,23.77 40.58,25.52 v1(39.78,25.52)
VAA5V: length 66.3
  TOP w0.254: C25.2 v4(28.63,33.98) ; C35.2 v4(35.6,33.98)
  TOP w0.381: U28.E1 v3(41.57,50.49) ; U28.E1 v3(41.57,49.22) ; U28.E1 v3(42.84,50.49) U28.D1 v3(44.11,50.49) ; U28.E1 v3(42.84,49.22)
  L2 w0.508: 35.6,36.52 31.17,36.52 v4(28.63,33.98) ; 35.6,36.52 35.6,38.82 39.98,43.19 45.69,43.19 47.28,41.6 TP7.1 ; 35.6,36.52 v4(35.6,33.98)
  L3 w0.508: TP7.1 49.95,43.03 39.98,43.03 39.98,50.49 v3(41.57,50.49) v3(42.84,50.49)
  BOTTOM w0.254: U8.2 36.13,34.51 v4(35.6,33.98) ; v4(28.63,33.98) 29.14,34.5 U5.2
  BOTTOM w0.381: v3(42.84,50.49) 42.45,50.88 42.45,52.01 C102.1
VAA12VN: length 177.7
  TOP w0.254: 24.93,50.37 v3(25.06,50.49) ; 26.2,50.37 v3(26.33,50.49)
  TOP w0.381: U27.G1 v3(26.33,51.76) ; U27.G1 v3(26.33,50.49) ; U27.G1 v3(25.06,50.49) U27.H1 ; v4(47.92,30.65) 45.56,30.65 C33.2 ; U27.G2 v3(25.06,49.22) U27.H2 ; U27.G2 v3(26.33,49.22) ; U27.G2 26.2,50.37 ; v3(23.79,50.49) U27.J2 v3(23.79,49.22) U27.H2 ; v4(26.87,30.66) 24.6,30.66 C27.2 ; U27.H2 24.93,50.37
  TOP w0.508: v4(47.92,30.65) 47.92,37.81 TP4.1
  L2 w0.508: 18.07,48.91 18.07,46.68 16.48,46.68 16.48,43.99 18.71,43.99 18.71,41.76 23.15,37.32 23.15,33.04 25.53,30.66 v4(26.87,30.66)
  L3 w0.508: v3(26.33,50.49) v3(26.33,51.76) 26.33,53.19 49.82,53.19 49.82,47 51.57,47 51.57,37.81 TP4.1 ; v3(26.33,50.49) v3(26.33,49.22) ; v3(26.33,50.49) v3(25.06,50.49) ; 45.38,14.45 48.95,14.45 v4(48.95,16.79) ; 45.38,14.45 v4(28.71,14.45) 27.36,14.45 v4(27.36,12.79) ; 45.38,14.45 45.38,30.66 v4(26.87,30.66)
  BOTTOM w0.254: U10.24 v4(48.95,16.79) ; R64.2 24.57,51.28 v3(23.79,50.49) ; 27.36,14.45 v4(27.36,12.79)
  BOTTOM w0.305: U9.24 27.36,14.45
  BOTTOM w0.381: U7.5 47.91,30.66 v4(47.92,30.65) ; C42.2 C41.2 v4(28.71,14.45) ; U6.5 v4(26.87,30.66) ; C111.2 v4(17.09,51.64) ; v4(48.95,16.79) 51.41,16.79 C48.2 C47.2
VAA12VP: length 183.5
  TOP w0.254: C34.2 v2(42.68,33.35) ; C28.2 v4(21.97,33.26)
  TOP w0.381: U27.A1 v3(33.95,50.49) U27.A2 ; U27.A1 v3(32.68,50.49) ; U27.A1 v3(33.95,51.76) ; v3(45.38,46.68) U28.B3 v3(46.65,46.68) ; U27.A2 v3(33.95,49.22) ; U27.A2 v3(32.68,49.22) U27.B2 v3(32.68,50.49) ; U27.B1 v3(32.68,50.49) ; v3(47.92,47.95) U28.A2 v3(46.65,47.95) U28.B2 v3(45.38,47.95) ; v3(41.57,47.95) U28.E2 v3(42.84,47.95) U28.D2 v3(44.11,47.95) ; v3(44.11,46.68) U28.D3 v3(42.84,46.68)
  L2 w0.508: TP3.1 53.25,35.73
  L2 w1.016: J2.9 49.34,32.93 49.34,35.73 ; 49.34,35.73 45.06,35.73 v2(42.68,33.35) ; 49.34,35.73 57.44,35.73 57.44,41.6 52.04,41.6 52.04,46.84 47.92,46.84 47.92,47
  L3 w0.508: J1.9 18.71,23.19 18.71,29.99 v4(21.97,33.26)
  L5 w0.508: 40.77,10.81 40.77,29.54 ; 40.77,10.81 45.29,10.81 46.96,9.14 v4(48.95,9.14) ; 40.77,10.81 40.77,8.82 v4(27.36,8.82) ; 40.77,29.54 40.77,33.35 v2(42.68,33.35) ; 40.77,29.54 24.42,29.54 24.42,33.26 v4(21.97,33.26)
  BOTTOM w0.254: v4(27.36,8.82) U9.1 27.36,5.49 26.64,4.77 C40.2 C39.2 ; v3(32.68,50.49) 32.19,50.98 R63.2 ; U7.8 42.84,32.56 42.68,32.71 v2(42.68,33.35) ; v4(48.95,9.14) U10.1 48.95,5.41 49.19,5.18 C46.2 C45.2 ; U6.8 21.88,31.86 21.97,31.96 v4(21.97,33.26)
  BOTTOM w0.381: C110.1 35.88,51.64 v4(35.85,51.61) ; C104.1 38.87,50.01 v4(38.87,50.02)
VPP: length 95
  TOP w0.254: v4(18.07,45.26) 19.18,44.14 v3(19.98,44.14)
  TOP w0.381: v3(33.95,42.87) U27.A7 v3(32.68,42.87) U27.B7 v3(31.41,42.87) ; v3(19.98,42.87) U27.L7 v3(21.25,42.87) U27.K7 v3(22.52,42.87) ; v3(21.25,44.14) U27.L6 v3(19.98,44.14) ; v3(32.68,45.41) U27.A5 v3(33.95,45.41) ; v3(21.25,45.41) U27.L5 v3(19.98,45.41) ; v3(33.95,44.14) U27.A6 v3(32.68,44.14)
  L5 w0.635: 16.8,23.06 J3.17 16.8,20.78 ; 14.26,23.32 J3.16 14.26,25.6 ; 14.26,20.52 J3.20 14.26,18.24 ; 14.26,20.78 J3.18 14.26,23.06 ; 16.8,18.24 J3.19 16.8,20.52 ; 16.8,25.6 J3.15 16.8,23.32
  L5 w1.016: J1.2 3.31,33.35 3.31,33.19 ; J1.2 5,34.94 4.89,34.94 ; J1.2 J1.1 ; 51.57,18.59 51.46,18.59 J2.1 ; 48.87,20.65 J2.1 ; J2.1 J2.2 ; 11.88,3.35 11.88,3.25 TP2.1 ; J2.2 54,18.59 54.27,18.59 ; J2.2 56.17,20.65 56.17,20.49 ; TP2.1 14.26,1.6 14.1,1.6 ; TP2.1 16.48,3.25 16.48,3.19 ; 19.02,19.38 J3.19 J3.20 12.2,19.38 ; J1.1 7.54,35.25 7.59,35.25 ; J1.1 9.5,33.35 ; 12.2,24.46 J3.16 J3.15 19.18,24.46 ; 12.04,21.76 12.04,21.92 J3.18 J3.17 19.02,21.92 19.02,21.76
  BOTTOM w0.381: C108.1 v4(36.23,44.31) ; C109.1 v4(18.07,45.26)
  BOTTOM w1.016: J3.20 J3.19 ; J2.2 J2.1 ; J1.1 J1.2 ; J3.18 J3.17 ; J3.16 J3.15
VPPN: length 73.4
  L3 w0.635: 14.26,43.38 J3.2 14.26,41.1 ; 51.46,26.87 J2.5 51.46,24.59 ; 14.26,40.84 J3.4 14.26,38.56 ; 7.54,27.13 J1.5 7.54,29.41 ; 16.8,43.38 J3.1 16.8,41.1 ; 5,29.41 J1.6 5,27.13 ; 16.8,38.56 J3.3 16.8,40.84 ; 54,24.59 J2.6 54,26.87
  L3 w1.016: 11.88,45.73 11.88,45.8 TP6.1 16.32,45.8 16.32,45.57 ; 12.2,42.24 J3.2 J3.1 18.71,42.24 18.71,42.08 ; 18.55,39.86 18.55,39.7 J3.3 J3.4 12.2,39.7 12.2,39.86 ; 9.34,28.11 9.34,28.27 J1.5 J1.6 2.99,28.27 2.99,28.43 ; 49.19,25.73 J2.5 J2.6 56.33,25.73 56.33,25.57 ; 18.71,37.16 J3.5 J3.6 11.88,37.16
  BOTTOM w1.016: J1.5 J1.6 ; J2.6 J2.5 ; J3.6 J3.5 ; TP6.1 J3.2 J3.1 ; J3.4 J3.3
X_POS: length 18.4
  TOP w0.254: R31.1 22.68,36.59 20.78,34.69 20.78,30.57 22.29,29.06 v4(23.16,29.06)
  BOTTOM w0.254: U6.7 23.15,29.06 v4(23.16,29.06)
X_POS1: length 40.1
  BOTTOM w0.254: J1.11 6.04,19.15 3.82,19.15 2.4,20.58 2.4,33.97 3.67,35.24 12.38,35.24 13.02,35.88 17.69,35.88 17.86,36.04 U6.1
X_POS2: length 36.5
  BOTTOM w0.254: U6.4 25.69,34.84 24.99,34.14 18.57,34.14 17.69,33.26 10.08,33.26 8.97,32.15 4.06,32.15 3.27,31.36 3.27,22.38 J1.12
XDAC_CS#: length 10.3
  TOP w0.254: v1(30.18,16.72) 30.58,17.12 P1.N2
  L2 w0.152: v4(24.76,12.72) 24.76,13.83 26.05,15.11 26.76,15.11 27.77,16.13 29.59,16.13 v1(30.18,16.72)
  BOTTOM w0.254: U9.20 v4(24.76,12.72)
XDAC_LDAC: length 11.2
  TOP w0.254: P1.L3 v1(30.98,18.32)
  L2 w0.152: v4(22.81,16.27) 24.47,17.93 30.59,17.93 v1(30.98,18.32)
  BOTTOM w0.254: U9.17 v4(22.81,16.27)
XDAC_RST#: length 26.5
  TOP w0.254: R55.2 v4(31.09,10.17) ; P1.L2 v1(30.18,18.32)
  L2 w0.152: v1(30.18,18.32) 29.91,18.59 24.14,18.59 22.16,16.61 v4(22.16,12.67)
  L2 w0.254: v4(31.09,10.17) 30.27,10.99 23.84,10.99 v4(22.16,12.67)
  BOTTOM w0.254: U9.16 v4(22.16,12.67)
XDAC_RSTSEL: length 19.2
  TOP w0.254: R46.2 v4(32.68,10.17) ; v1(31.78,16.72) 32.18,17.12 P1.N4
  L2 w0.152: v4(26.09,12.74) 26.09,13.69 26.63,14.22 27.04,14.22 28.18,15.37 30.43,15.37 v1(31.78,16.72)
  L2 w0.254: v4(26.09,12.74) 27.28,11.55 31.3,11.55 v4(32.68,10.17)
  BOTTOM w0.254: v4(26.09,12.74) 26.06,12.77 U9.22
XDAC_SCK: length 12
  TOP w0.254: v1(30.98,16.72) 31.38,17.12 P1.N3
  L2 w0.152: v4(25.41,11.91) 25.41,13.77 26.33,14.68 26.91,14.68 27.98,15.75 30.01,15.75 v1(30.98,16.72)
  BOTTOM w0.254: U9.21 v4(25.41,11.91)
XDAC_SDI: length 12.4
  TOP w0.254: v1(29.38,17.52) 29.78,17.92 P1.M1
  L2 w0.152: v1(29.38,17.52) 25.02,17.52 23.46,15.96 v4(23.46,12.67)
  BOTTOM w0.254: U9.18 v4(23.46,12.67)
XDAC_SDO: length 14.2
  TOP w0.254: v1(30.18,17.52) 30.58,17.92 P1.M2
  L2 w0.152: v1(30.18,17.52) 29.78,17.12 25.31,17.12 24.11,15.92 v4(24.11,11.86)
  BOTTOM w0.254: U9.19 v4(24.11,11.86)
XMOTOR_DRV: length 35.5
  BOTTOM w0.254: J1.7 8.56,25.73 8.56,25.73 17.45,25.73 18.48,24.7 18.48,11.71 20.86,9.33 U9.11 20.86,5.21 22.81,5.21 U9.8
XPADC_CS: length 3.9
  TOP w0.254: P1.A5 v1(32.58,27.12)
  BOTTOM w0.152: U5.11 31.75,29.16 32.58,28.32 v1(32.58,27.12)
XPADC_RST: length 3.7
  TOP w0.254: P1.A6 v1(33.38,27.12)
  BOTTOM w0.152: U5.9 33.05,29.02 33.38,28.68 v1(33.38,27.12)
XPADC_RVS: length 4.4
  TOP w0.254: P1.A3 v1(30.98,27.12)
  BOTTOM w0.152: U5.15 29.14,28.96 v1(30.98,27.12)
XPADC_SCK: length 5
  TOP w0.254: P1.B5 v1(32.58,26.32)
  BOTTOM w0.152: U5.12 31.1,29.16 32.19,28.07 32.19,26.71 v1(32.58,26.32)
XPADC_SDI: length 4.8
  TOP w0.254: P1.B6 v1(33.38,26.32)
  BOTTOM w0.152: U5.10 32.4,29.11 32.99,28.52 32.99,26.71 v1(33.38,26.32)
XPADC_SDO0: length 4.1
  TOP w0.254: P1.A4 v1(31.78,27.12)
  BOTTOM w0.152: U5.13 30.44,29.05 31.78,27.72 v1(31.78,27.12)
XPADC_SDO1: length 5.2
  TOP w0.254: P1.B4 v1(31.78,26.32)
  BOTTOM w0.152: v1(31.78,26.32) 31.38,26.72 31.38,27.53 29.79,29.12 U5.14
XY_CLK: length 34.5
  TOP w0.254: P1.H2 v1(30.18,20.72)
  L2 w0.152: v1(30.18,20.72) 29.3,21.6 27.2,21.6 26.17,22.63 25.23,22.63 24.65,23.22 13.47,23.22 6.32,16.07 6.32,13.6 v4(5.12,12.39)
  BOTTOM w0.254: U11.13 v4(5.12,12.39)
XY_CLK+: length 23.1
  TOP w0.254: J3.29 15.09,4.97 8.34,4.97 6.12,7.19 6.12,12.66 v4(5.12,13.66) 3.3,13.66 R45.1
  BOTTOM w0.254: U11.14 v4(5.12,13.66)
XY_CLK-: length 20.9
  TOP w0.254: J3.30 13.1,5.52 8.58,5.52 6.68,7.43 6.68,13.37 v4(5.12,14.93) 3.3,14.93 R45.2
  BOTTOM w0.254: 3.21,14.93 v4(5.12,14.93)
XY_STATUS: length 6.3
  TOP w0.254: P1.F1 v1(29.38,23.12)
  L2 w0.152: v4(25.7,23.83) 26.41,23.12 v1(29.38,23.12)
  BOTTOM w0.254: v4(25.7,23.83) 25.69,23.84 U12.4
XY_STATUS+: length 15
  TOP w0.254: J3.21 19.42,16.84 21.34,18.76 22.53,18.76 24.42,20.65 v4(24.42,21.93)
  BOTTOM w0.254: v4(24.42,21.93) U12.6 24.42,18.26 24.57,18.11 R44.1
XY_STATUS-: length 16.4
  TOP w0.254: J3.22 15.54,18.12 19.75,18.12 21.1,19.47 22.29,19.47 23.15,20.33 v4(23.15,21.92)
  BOTTOM w0.254: v4(23.15,21.92) U12.7 23.15,18.26 23,18.11 R44.2
XY_SYNC: length 29.6
  TOP w0.254: P1.J2 v1(30.18,19.92)
  L2 w0.152: v1(30.18,19.92) 28.97,21.13 21.91,21.13 21.4,20.62 12.49,20.62 9.5,17.63 9.5,14.87 v4(10.7,13.66)
  BOTTOM w0.254: U11.3 v4(10.7,13.66)
XY_SYNC+: length 15.8
  TOP w0.254: J3.27 15.48,7.9 13.65,7.9 11.91,9.64 11.91,13.73 v4(10.7,14.93) 9.01,14.93 R41.1
  BOTTOM w0.254: 8.8,14.93 v4(10.7,14.93)
XY_SYNC-: length 12.3
  TOP w0.254: R41.2 9.01,16.2 v4(10.7,16.2) 12.54,14.37 12.54,10.94 J3.28
  BOTTOM w0.254: U11.1 v4(10.7,16.2)
XY_X: length 25.4
  TOP w0.254: P1.K1 v1(29.38,19.12)
  L2 w0.152: v4(10.7,11.12) 12.67,13.09 12.67,14.78 13.52,15.62 18.2,15.62 21.7,19.12 v1(29.38,19.12)
  BOTTOM w0.254: U11.5 v4(10.7,11.12)
XY_X+: length 11.7
  TOP w0.254: R42.1 9.01,9.85 v4(10.7,9.85)
  L2 w0.254: v4(10.7,9.85) 13.8,12.95 15.61,12.95 J3.25
  BOTTOM w0.254: U11.6 v4(10.7,9.85)
XY_X-: length 9
  TOP w0.254: R42.2 9.01,8.58 v4(10.7,8.58)
  L2 w0.254: J3.26 12.56,10.06 12.56,9.45 11.69,8.58 v4(10.7,8.58)
  BOTTOM w0.254: U11.7 v4(10.7,8.58)
XY_Y: length 33.3
  TOP w0.254: P1.J1 v1(29.38,19.92)
  L2 w0.152: v4(5.12,9.85) 8.29,13.03 11.31,13.03 12.04,13.75 12.04,16.84 13.33,18.14 19.7,18.14 22.16,20.6 28.7,20.6 v1(29.38,19.92)
  BOTTOM w0.254: U11.11 v4(5.12,9.85)
XY_Y+: length 25.4
  TOP w0.254: v4(5.12,8.58) 3.3,8.58 R43.1
  BOTTOM w0.254: U11.10 v4(5.12,8.58) 7.78,5.92 10.88,5.92 11.91,6.95 11.91,14 13.49,15.59 15.51,15.59 J3.23
XY_Y-: length 21
  TOP w0.254: v4(5.12,7.31) 3.3,7.31 R43.2
  BOTTOM w0.254: 3.21,7.31 v4(5.12,7.31) 7.07,5.37 11.19,5.37 12.54,6.71 12.54,12.58 J3.24
Y_POS: length 12.8
  TOP w0.254: R34.1 39.68,36.51 41.09,35.1 41.09,30.97 42.86,29.2 v4(44.11,29.2)
  BOTTOM w0.254: U7.7 v4(44.11,29.2)
Y_POS1: length 10.6
  BOTTOM w0.254: U7.1 42.84,34.62 43.32,34.13 47.49,34.13 48.27,33.35 J2.11
Y_POS2: length 8.5
  BOTTOM w0.254: J2.12 51.31,36.04 U7.4
YDAC_CS#: length 14.9
  TOP w0.254: P1.J12 v1(38.98,19.92)
  L2 w0.152: v4(46.35,13.45) 46.35,14.93 45.86,15.42 45.86,18.1 43.64,20.32 39.38,20.32 v1(38.98,19.92)
  BOTTOM w0.254: U10.20 v4(46.35,13.45)
YDAC_LDAC: length 14.1
  TOP w0.254: P1.L12 v1(38.98,18.32)
  L2 w0.152: v1(38.98,18.32) 39.78,19.12 42.62,19.12 44.4,17.34 v4(44.4,12.66)
  BOTTOM w0.254: U10.17 v4(44.4,12.66)
YDAC_RST#: length 17.2
  TOP w0.254: P1.L13 v1(39.78,18.32) ; R56.2 v4(38.07,10.17)
  L2 w0.152: v1(39.78,18.32) 40.56,18.32 43.75,15.13 v4(43.75,13.45)
  BOTTOM w0.254: U10.16 v4(43.75,13.45) 43.1,13.45 40.65,11 38.9,11 v4(38.07,10.17)
YDAC_RSTSEL: length 32.5
  TOP w0.254: P1.G13 39.38,21.92 v1(39.78,22.32) ; v4(47.65,13.45) 47.65,12 46.62,10.97 35.7,10.97 v4(34.9,10.17)
  L2 w0.152: v4(47.65,13.45) 47.65,18.2 43.53,22.32 v1(39.78,22.32)
  BOTTOM w0.254: R47.2 v4(34.9,10.17) ; U10.22 v4(47.65,13.45)
YDAC_SCK: length 16.4
  TOP w0.254: P1.H13 v1(39.78,20.72)
  L2 w0.152: v1(39.78,20.72) 43.96,20.72 46.26,18.41 46.26,15.62 47,14.88 v4(47,12.67)
  BOTTOM w0.254: U10.21 v4(47,12.67)
YDAC_SDI: length 13.2
  TOP w0.254: P1.K12 v1(38.98,19.12)
  L2 w0.152: v4(45.05,13.45) 45.05,17.48 43,19.53 39.39,19.53 v1(38.98,19.12)
  BOTTOM w0.254: U10.18 v4(45.05,13.45)
YDAC_SDO: length 14.7
  TOP w0.254: P1.J13 v1(39.78,19.92)
  L2 w0.152: v1(39.78,19.92) 43.25,19.92 45.43,17.74 45.43,15.11 45.7,14.84 v4(45.7,12.66)
  BOTTOM w0.254: U10.19 v4(45.7,12.66)
YMOTOR_DRV: length 32.1
  L2 w0.254: J2.7 49.29,26.1 49.29,18.72 50.12,17.88 50.12,15.11 49.08,14.07 49.08,12.8 46.47,10.19 43.43,10.19 v4(42.45,9.2)
  BOTTOM w0.254: v4(42.45,9.2) U10.11 42.45,6.05 42.97,5.52 44,5.52 44.4,5.92 U10.8
YPADC_CS: length 5.3
  TOP w0.254: P1.B10 v1(37.38,26.32)
  BOTTOM w0.152: v1(37.38,26.32) 36.99,26.71 36.99,27.38 38.73,29.12 U8.11
YPADC_RST: length 4.4
  TOP w0.254: P1.A11 v1(38.19,27.13)
  BOTTOM w0.152: v1(38.19,27.13) 40.03,28.97 U8.9
YPADC_RVS: length 4.1
  TOP w0.254: P1.A7 v1(34.99,27.13)
  BOTTOM w0.152: v1(34.99,27.13) 34.99,28.18 36.13,29.31 U8.15
YPADC_SCK: length 4.2
  TOP w0.254: P1.A9 v1(36.59,27.13)
  BOTTOM w0.152: v1(36.59,27.13) 36.59,27.51 38.08,29 U8.12
YPADC_SDI: length 4.4
  TOP w0.254: P1.A10 v1(37.39,27.13)
  BOTTOM w0.152: v1(37.39,27.13) 37.66,27.4 37.66,27.42 39.38,29.13 U8.10
YPADC_SDO0: length 5.9
  TOP w0.254: P1.C9 v1(36.58,25.52)
  BOTTOM w0.152: U8.13 37.43,28.96 36.2,27.73 36.2,25.9 v1(36.58,25.52)
YPADC_SDO1: length 4
  TOP w0.254: P1.A8 v1(35.79,27.13)
  BOTTOM w0.152: U8.14 36.78,29 35.79,28.01 v1(35.79,27.13)
N226020: length 7.3
  BOTTOM w0.254: U6.3 24.42,38.02 21.71,38.02 R32.2
  BOTTOM w0.381: R33.2 R32.2
N226052: length 7.6
  BOTTOM w0.254: U6.2 23.15,37.46 20.14,37.46 R32.1
  BOTTOM w0.381: R33.1 R32.1
N226084: length 4.7
  BOTTOM w0.254: R35.2 45.84,38.35 45.38,37.88 U7.3
  BOTTOM w0.381: R36.2 R35.2
N226092: length 4.6
  BOTTOM w0.254: R35.1 44.27,38.35 44.11,38.19 U7.2
  BOTTOM w0.381: R36.1 R35.1
N226292: length 2.8
  BOTTOM w0.254: C22.2 29.5,38.41 30.44,37.47 U5.4
N226324: length 4.2
  BOTTOM w0.254: C24.2 C23.2 31.09,38.1 31.75,37.44 U5.6
N226514: length 7.7
  TOP w0.254: R31.2 31.24,35.24 v4(32.4,35.24)
  BOTTOM w0.254: v4(32.4,35.24) U5.7 32.4,37.5 32.59,37.7 33.94,37.7 34.25,38.02 34.25,38.14 34.26,38.15 C21.2
N226706: length 2.6
  BOTTOM w0.254: C30.2 36.8,38.15 37.43,37.52 U8.4
N226730: length 4.1
  BOTTOM w0.254: U8.6 38.73,37.81 38.39,38.15 C31.2 C32.2
N227168: length 9.5
  TOP w0.254: R34.2 36.95,36.2 v4(36.95,35.16)
  BOTTOM w0.254: C29.2 41.57,38.15 41.27,37.86 39.63,37.86 39.38,37.6 U8.7 39.38,35.16 v4(36.95,35.16)
N229341: length 6.9
  BOTTOM w0.254: U9.3 26.06,5.78 25.69,5.41 24.1,5.41 23.47,4.77 C37.2 R38.2
N229345: length 15.4
  TOP w0.254: v4(20.78,2.08) 22.99,2.08 26.71,5.8 v4(26.71,9.79)
  BOTTOM w0.254: U9.2 v4(26.71,9.79) ; R38.1 20.78,2.08 v4(20.78,2.08)
N229701: length 4.9
  BOTTOM w0.254: R40.2 C43.2 47.6,4.74 47.65,4.79 U10.3
N229705: length 12.7
  TOP w0.254: v4(45.14,2.4) 48.3,5.56 v4(48.3,10.1)
  BOTTOM w0.254: R40.1 v4(45.14,2.4) ; U10.2 v4(48.3,10.1)
N240581: length 3
  TOP w0.381: U28.A4 v3(47.92,45.41)
  BOTTOM w0.381: v3(47.92,45.41) 48.38,45.88 R57.1
N240585: length 2.7
  TOP w0.381: U28.E4 v3(41.57,45.41)
  BOTTOM w0.381: R58.1 41.1,45.88 v3(41.57,45.41)
N241423: length 7.4
  TOP w0.381: U27.H7 v3(23.79,42.87) ; U27.E6 v3(28.87,44.14)
  BOTTOM w0.254: v3(28.87,44.14) 28.26,43.54 24.45,43.54 v3(23.79,42.87)
N298949: length 4
  TOP w0.381: D1.2 v4(56.61,43.16)
  BOTTOM w0.254: R59.1 55.69,43.16 v4(56.61,43.16)
N299720: length 4
  TOP w0.381: D2.2 v4(56.61,46.97)
  BOTTOM w0.254: v4(56.61,46.97) 55.69,46.97 R60.1
N2414151: length 6.1
  TOP w0.381: U27.E7 v3(27.6,42.87)
  BOTTOM w0.254: R61.2 26.98,39.06 27.6,39.68 v3(27.6,42.87)
N2414351: length 3.4
  TOP w0.381: U27.G7 v3(25.06,42.87)
  BOTTOM w0.254: v3(25.06,42.87) 25.84,42.09 R62.2
N24162114: length 3.4
  TOP w0.381: U27.C1 v3(31.41,50.49)
  BOTTOM w0.254: v3(31.41,50.49) 30.62,51.28 R63.1
N24162156: length 3.3
  TOP w0.381: U27.J1 v3(22.52,50.49)
  BOTTOM w0.254: R64.1 23,50.98 v3(22.52,50.49)

## Copper pours and planes (outline as drawn; the poured copper is in the pictures)
DGND on L4: 41.88,32.71 41.88,16.36 32.04,16.36 32.04,10.65 35.69,10.65 35.69,12.55 46.33,12.55 46.33,16.68 49.82,16.68 49.82,10.01 40.93,10.01 40.93,5.89 29.34,5.89 29.34,14.78 22.52,14.78 22.52,0.49 17.59,0.49 17.59,5.25 19.02,5.25 19.02,21.13 25.06,21.13 25.06,32.71
GND on L4: 21.4,26.21 9.02,26.21 9.02,28.9 0.45,28.9 0.45,35.89 6.96,35.89 6.96,46.84 13.15,46.84 13.15,44.62 15.37,44.62 15.37,53.51 47.44,53.51 47.44,51.45 46.01,51.45 46.01,45.26 49.82,45.26 49.82,24.3 55.06,24.3 55.06,22.08 43.79,22.08 43.79,34.78 38.07,34.78 38.07,40.65 21.4,40.65
VCCA on L5: 31.25,25.09 31.25,18.59 32.83,18.59 32.83,20.33 36.33,20.33 36.33,18.59 37.91,18.59 37.91,25.09
VCCO on L3: 32.99,23.51 32.99,20.33 36.17,20.33 36.17,23.51
VDD3V3 on L2: 44.9,48.91 44.9,53.51 48.71,53.51 48.71,48.91
VDD3V3 on L3: 36.17,17.16 32.83,17.16 32.83,15.25 26.48,15.25 26.48,11.92 28.23,11.92 28.23,13.66 39.82,13.66 39.82,0.49 28.39,0.49 28.39,9.22 19.82,9.22 19.82,28.43 44.11,28.43 44.11,15.09 37.91,15.09 37.91,25.09 31.41,25.09 31.41,19.38 36.17,19.38
VAA5V on L2: 40.93,53.51 40.93,48.91 44.58,48.91 44.58,53.51
VAA5V on L3: 40.93,51.76 40.93,48.91 44.58,48.91 44.58,51.76
VAA12VN on L2: 27.44,48.27 27.44,53.51 15.53,53.51 15.53,48.27
VAA12VN on L3: 27.44,52.4 27.44,48.59 22.99,48.59 22.99,52.4
VAA12VP on L2: 31.72,53.51 31.72,46.21 48.71,46.21 48.71,48.59 40.61,48.59 40.61,53.51
